# Altium PCB PCB_2020-05-24_14-58-45_2020-05-25_04-14-55.pcbdoc
Units mil, origin at the board's own origin, x right, y up, seen from the top; angles counter-clockwise.
Board outline 4835 x 2600 mil, 2 copper layers (Top Layer, Bottom Layer); 44 components, 69 nets, 258 pads, 0 vias.
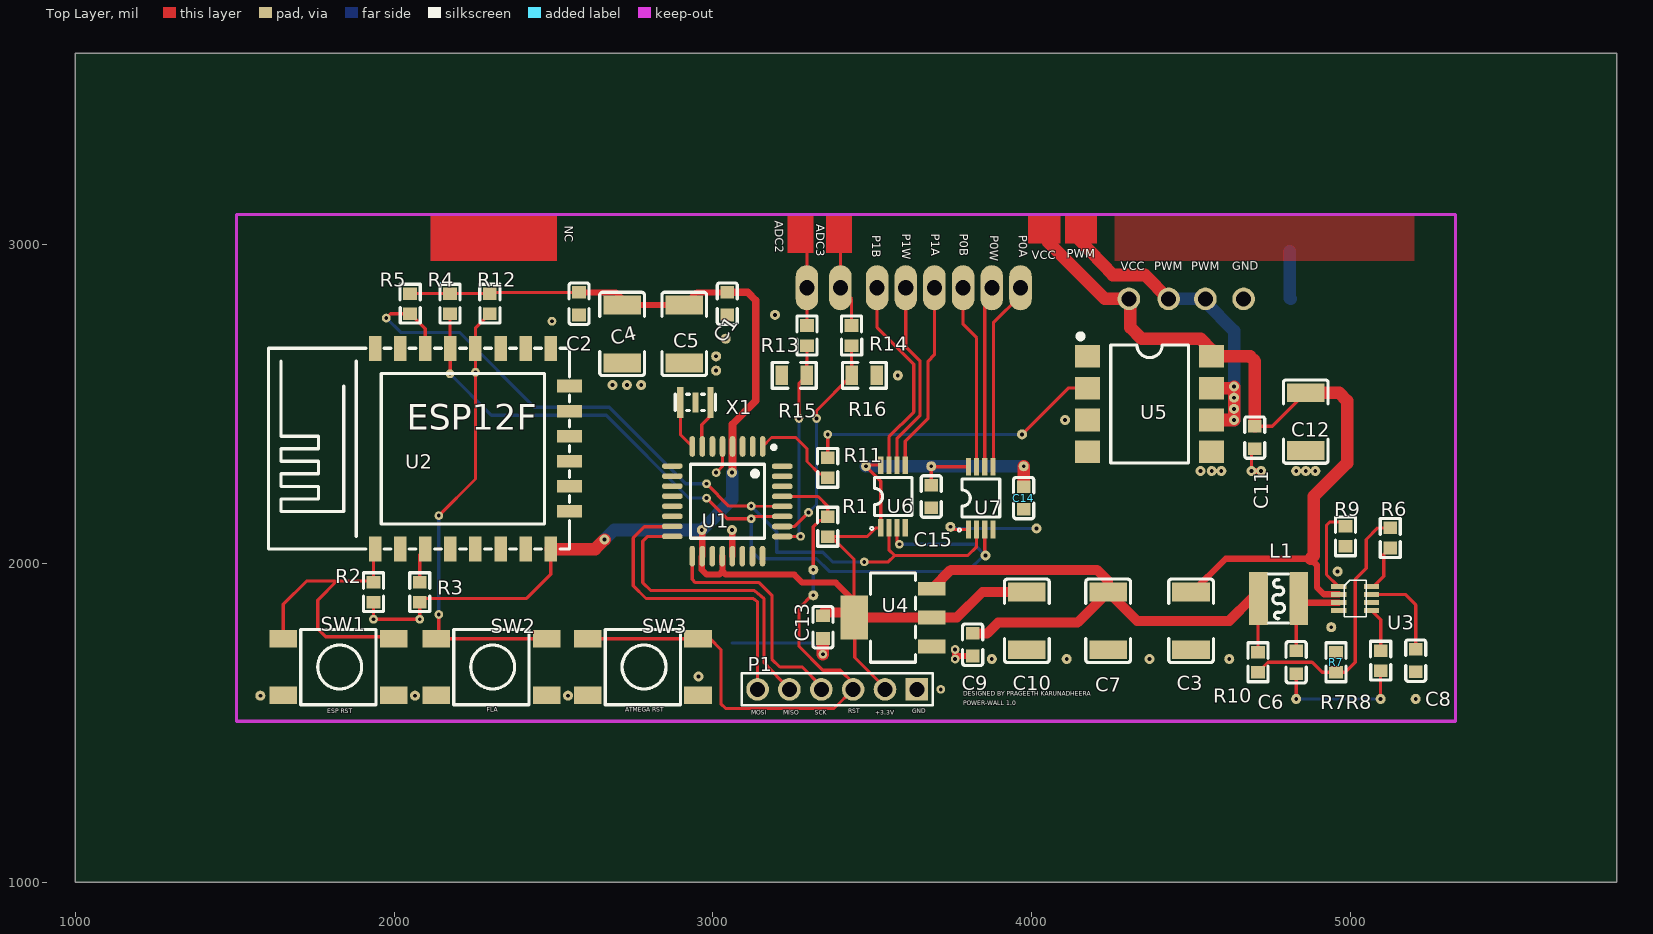
[diagram p0: Top Layer view]
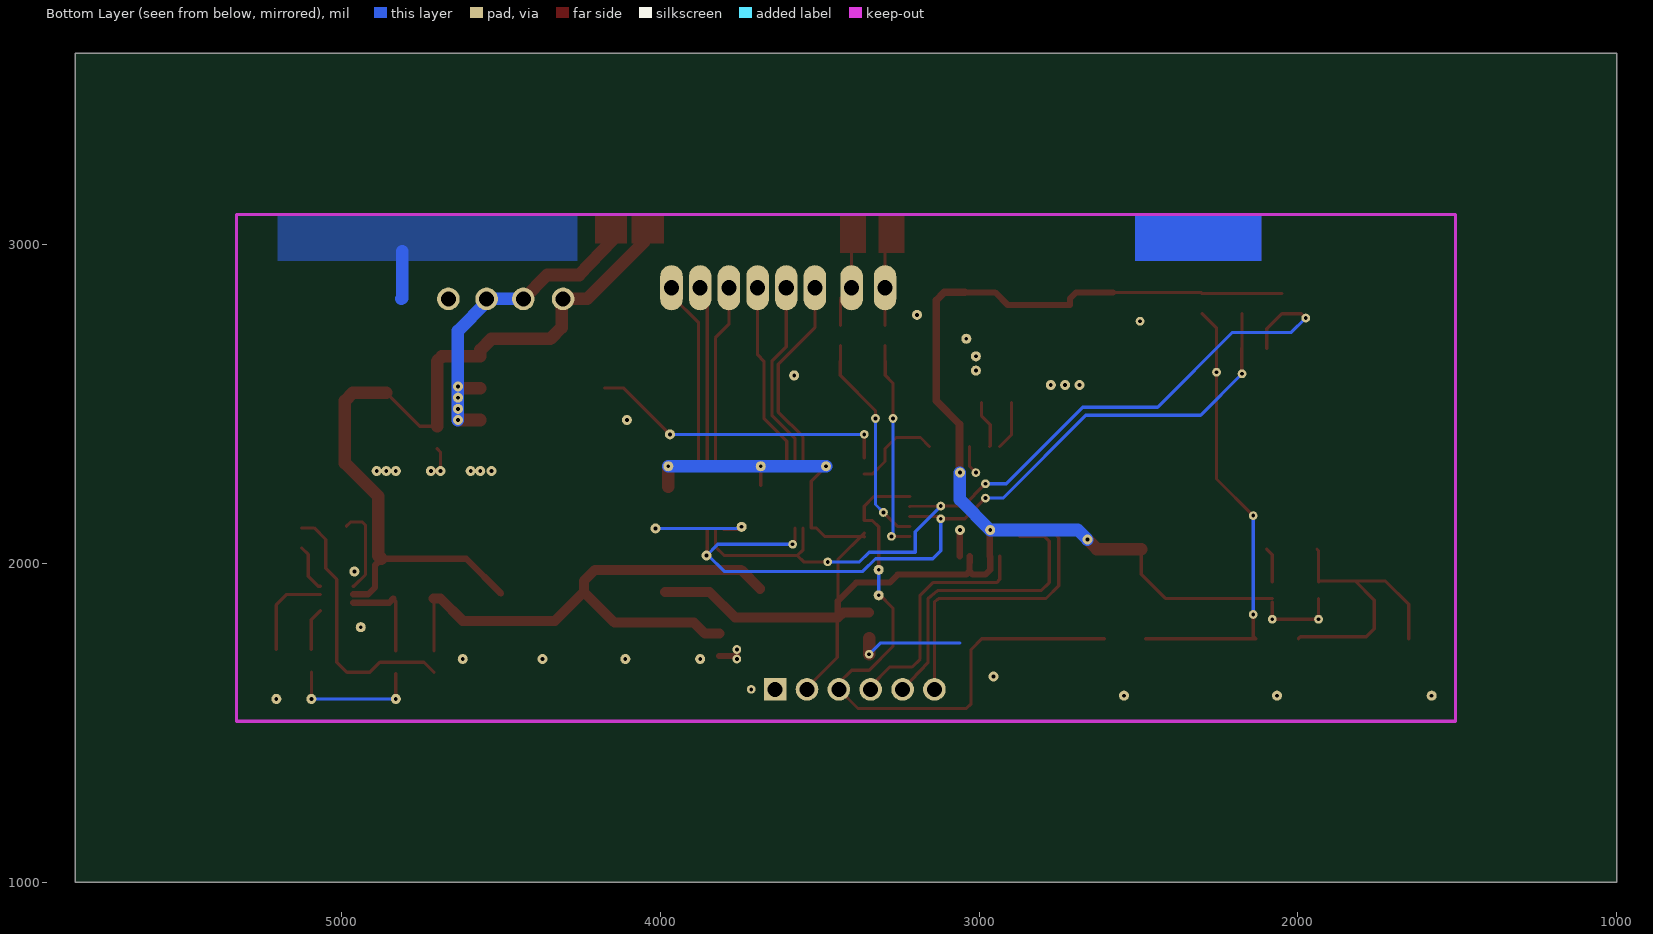
[diagram p1: Bottom Layer view, seen from below]

## Layer stack, top to bottom
Top Layer: signal copper (thickness not stored)
Dielectric: dielectric 12.6, FR-4, Dk 4.8
Bottom Layer: signal copper (thickness not stored)

## Board outline
5835,1000 1000,1000 1000,3600 5835,3600

## Components (designator, comment, footprint, x,y, rotation, side; value= is the part's Value field where it differs from the comment)
C1 "0.1u" C0603 3045.03,2815 r270 top
C2 "0.1u" C0603 2580.03,2815 r270 top
C3 "22uF" C1812 4500,1820 r270 top
C4 "10uF" C1812 2910,2720 r90 top
C5 "10uF" C1812 2715,2720 r270 top
C6 "0.1u" C0603 4830,1690 r270 top
C7 "47uF" C1812 4240,1820 r270 top
C8 "0.1u" C0603 5205.03,1695 r90 top
C9 "0.1u" C0603 3815,1745 r270 top
C10 "10uF" C1812 3985,1820 r270 top
C11 "0.1u" C0603 4700,2395 r90 top
C12 "22uF" C1812 4860,2445 r270 top
C13 "0.1u" C0603 3345,1800 r90 top
C14 "0.1u" C0603 3975,2205 r270 top
C15 "0.1u" C0603 3685,2210 r270 top
L1 "4.7uH" L0420 4775,1890 r0 top
P1 "Header-Female-2.54_1x6" HDR-TH_6P-P2.54-V 3390,1605 r180 top
R1 "10k" R0603 3360.03,2115 r270 top
R2 "10k" R0603 1935.03,1910 r270 top
R3 "10k" R0603 2080.03,1910 r270 top
R4 "10k" R0603 2175.03,2815 r270 top
R5 "10k" R0603 2050,2815 r270 top
R6 "20k" R0603 5125,2080 r270 top
R7 "7.5k" R0603 4955.03,1690 r90 top
R8 "20" R0603 5095.03,1695 r270 top
R9 "75k" R0603 4985,2085 r90 top
R10 "402k" R0603 4710.03,1690 r90 top
R11 "1k" R0603 3360.03,2300 r270 top
R12 "10k" R0603 2300,2815 r270 top
R13 "10k" R0603 3295,2715 r270 top
R14 "10k" R0603 3435,2715 r270 top
R15 "470" R0805 3254.97,2590 r0 top
R16 "470" R0805 3474.97,2590 r180 top
SW1 "RESET" SW-SMD_4PIN-L6.00-W6.00 1825,1675 r0 top
SW2 "FLASH" SW-SMD_4PIN-L6.00-W6.00 2305,1675 r0 top
SW3 "RESET" SW-SMD_4PIN-L6.00-W6.00 2780,1675 r0 top
U1 "ATMEGA328PB-AU" TQFP-32_L7.0-W7.0-P0.80-LS9.0-BL 3045,2195 r180 top
U2 "ESP-12F(ESP8266MOD)" WIFIM-SMD_ESP-12F-ESP8266MOD 2245,2360 r90 top
U3 "MP2315GJ-Z" MP2315GJ-Z_TSOT-23-8 5015,1890 r0 top
U4 "AMS1117-3.3" SOT-223-3_L6.5-W3.4-P2.30-LS7.0-BR 3565,1830 r0 top
U5 "FOD3180SD" SOIC-8_L9.5-W6.6-P2.54-LS10.7-BL 4370,2500 r0 top
U6 "MCP4561-104E/MS" MSOP-8_L3.0-W3.0-P0.65-LS5.0-BL 3565,2210 r0 top
U7 "MCP4561-503E/MS" MSOP-8_L3.0-W3.0-P0.65-LS5.0-BL 3840,2205 r0 top
X1 "8MHz" OSC-SMD_3P-L3.2-W1.3-P1.2-L 2945,2505 r180 top

## Footprints (in the part's own frame and the unit in brackets; to place one, negate y for a bottom-side part, rotate by r counter-clockwise, add the part's x,y. Pads: shape width x height; smd on the part's side, far side on the other; paste and mask are expansions set on the pad)
C0603 [mm]
  rect 1x1.1 smd: 1(-0.9,0) 2(0.9,0)
  silkscreen extent -1.65,-0.8 1.65,0.8
C1812 [mm]
  rect 1.5x3 smd: 1(-2.305,0) 2(2.305,0)
  silkscreen extent -3.32,-1.78 3.32,1.78
HDR-TH_6P-P2.54-V [mm]
  rect 1.8x1.8 hole 1.2: 1(-6.35,0)
  round 1.8 hole 1.2: 2(-3.81,0) 3(-1.27,0) 4(1.27,0) 5(3.81,0) 6(6.35,0)
  silkscreen extent -7.62,-1.27 7.62,1.27
L0420 [mil]
  rect 59.1x165.4 smd: 1(-63,0) 2(63,0)
  silkscreen extent -31,-77 31,77
MP2315GJ-Z_TSOT-23-8 [mm]
  rect 1.22x0.4 smd: 1(-1.31,0.97) 2(-1.31,0.33) 3(-1.31,-0.33) 4(-1.31,-0.97) 5(1.31,-0.97) 6(1.31,-0.33) 7(1.31,0.33) 8(1.31,0.97)
  silkscreen extent -0.88,-1.45 0.88,1.45
MSOP-8_L3.0-W3.0-P0.65-LS5.0-BL [mil]
  rect 16x55 smd: 1(-38.39,-98.5) 2(-12.8,-98.5) 3(12.8,-98.5) 4(38.39,-98.5) 5(38.39,98.5) 6(12.8,98.5) 7(-12.8,98.5) 8(-38.39,98.5)
  silkscreen extent -72,-105 60,60
OSC-SMD_3P-L3.2-W1.3-P1.2-L [mil]
  rect 19.68x98.42 smd: 1(-47.2,0) 3(47.2,0)
  rect 19.68x63 smd: 2(0,0)
  silkscreen extent -63,-26 63,26
R0603 [mm]
  rect 1x1.1 smd: 1(-0.8,0) 2(0.8,0)
  silkscreen extent -1.55,-0.8 1.55,0.81
R0805 [mm]
  rect 1x1.55 smd: 1(-1,0) 2(1,0)
  silkscreen extent -1.75,-1.02 1.75,1.02
SOIC-8_L9.5-W6.6-P2.54-LS10.7-BL [mm]
  rect 2x1.8 smd: 1(-4.951,3.81) 2(-4.951,1.27) 3(-4.951,-1.27) 4(-4.951,-3.81) 5(4.95,-3.81) 6(4.95,-1.27) 7(4.95,1.27) 8(4.95,3.81)
  silkscreen extent -5.7,-4.7 3.1,5.6
SOT-223-3_L6.5-W3.4-P2.30-LS7.0-BR [mm]
  rect 2.2x1.1 smd: 1(3.099,-2.3) 2(3.099,0) 3(3.099,2.3)
  rect 2.2x3.5 smd: 4(-3.099,0)
  silkscreen extent -1.8,-3.55 1.8,3.55
SW-SMD_4PIN-L6.00-W6.00 [mm]
  rect 2.2x1.4 smd: 1(-4.4,2.25) 2(4.4,2.25) 3(-4.4,-2.25) 4(4.4,-2.25)
  silkscreen extent -3,-3 3,3
TQFP-32_L7.0-W7.0-P0.80-LS9.0-BL [mm]
  oval 0.45x1.65 smd: 1(-2.817,-4.369) 2(-2.017,-4.369) 3(-1.217,-4.369) 4(-0.417,-4.369) 5(0.381,-4.369) 6(1.181,-4.369) 7(1.981,-4.369) 8(2.781,-4.369) 17(2.792,4.369) 18(1.991,4.369) 19(1.191,4.369) 20(0.391,4.369) 21(-0.406,4.369) 22(-1.206,4.369) 23(-2.007,4.369) 24(-2.807,4.369)
  oval 1.65x0.45 smd: 9(4.382,-2.804) 10(4.382,-2.004) 11(4.382,-1.204) 12(4.382,-0.404) 13(4.382,0.394) 14(4.382,1.194) 15(4.382,1.994) 16(4.382,2.794) 25(-4.381,2.804) 26(-4.381,2.004) 27(-4.381,1.204) 28(-4.381,0.404) 29(-4.381,-0.394) 30(-4.381,-1.194) 31(-4.381,-1.994) 32(-4.381,-2.794)
  silkscreen extent -3.86,-4.45 2.94,2.95
WIFIM-SMD_ESP-12F-ESP8266MOD [mm]
  rect 2x1 smd: 1(-8.002,7.751) 2(-8.002,5.751) 3(-8.002,3.751) 4(-8.002,1.751) 5(-8.002,-0.249) 6(-8.002,-2.249) 7(-8.002,-4.249) 8(-8.001,-6.249) 9(7.999,-6.249) 10(8,-4.249) 11(8.001,-2.249) 12(8.001,-0.249) 13(8,1.751) 14(8.001,3.751) 15(8,5.751) 16(8.001,7.751)
  rect 1x2 smd: 17(-5,-7.75) 18(-3.002,-7.749) 19(-1.003,-7.749) 20(0.998,-7.749) 21(2.997,-7.749) 22(4.997,-7.75)
  silkscreen extent -8,-7.75 8,16.25

## Free pads (board coordinates)
  round 70.87 hole 47.24: 1(4545,2830) 1(4665,2830) 2(4430,2830) 3(4305,2830)
  oval 70.87x141.73 hole 47.24: 3(3295,2865) 3(3400,2865) 3(3515,2865) 3(3605,2865) 3(3695,2865) 3(3785,2865) 3(3875,2865) 3(3965,2865)
  round 31.5 hole 12: ""(1580,1585) ""(2065,1585) ""(2545,1585) ""(2660,2075) ""(2685,2560) ""(2730,2560) ""(2775,2560) ""(2955,1645) ""(2965,2105) ""(3010,2605) ""(3010,2650) ""(3040,2705) ""(3060,2105) ""(3060,2285) ""(3195,2780) ""(3315,1900) ""(3315,1980) ""(3480,2305) ""(3580,2590) ""(3685,2305) ""(3745,2115) ""(3855,2025) ""(3875,1700) ""(3970,2405) ""(3975,2305) ""(4015,2110) ""(4105,2450) ""(4110,1700) ""(4370,1700) ""(4530,2290) ""(4565,2290) ""(4595,2290) ""(4620,1700) ""(4635,2450) ""(4635,2485) ""(4635,2520) ""(4635,2555) ""(4690,2290) ""(4720,2290) ""(4830,1575) ""(4830,2290) ""(4860,2290) ""(4890,2290) ""(4940,1800) ""(4960,1975) ""(5095,1575) ""(5205,1575)
  round 27.56 hole 12: ""(1935,1825) ""(1975,2770) ""(2080,1825) ""(2140,1840) ""(2140,2150) ""(2175,2595) ""(2255,2600) ""(2495,2760) ""(2980,2205) ""(2980,2250) ""(3010,2285) ""(3120,2140) ""(3120,2180) ""(3270,2455) ""(3275,2085) ""(3300,2160) ""(3325,2455) ""(3345,1715) ""(3360,2405) ""(3475,2005) ""(3585,2060) ""(3715,1605) ""(3760,1700) ""(3760,1730)

## Nets (pads, with @x,y where several pads share a name; then routed paths per layer and width w, separated by ;. In a path a pad name is that pad's centre, name@x,y a point inside that pad or via, vN(x,y) a via of type N, cw(c..) or ccw(c..) an arc to the next point about the centre after c; other vN are vias at no path point)
+3.3V: C1.1 C2.1 C4.2 C5.1 C10.1 C13.2 C14.1 C15.1 P1.2 pad.@1935,1825 pad.@2080,1825 pad.@2660,2075 pad.@2965,2105 pad.@3060,2285 pad.@3480,2305 pad.@3685,2305 pad.@3975,2305 R1.2 R2.2 R3.2 R4.1 R5.1 R12.1 U1.4 U1.18 U1.20 U2.8 U4.2 U4.4 U6.1 U6.8 U7.8 | length 6389.3
  Top Layer w10: R2.2@1935,1890.32 1935,1825 2080,1825 R3.2 ; R5.1 R4.1 R12.1 2303.94,2850.43 C2.1 ; R3.2@2080,1890.32 2415.32,1890.32 2491.04,1966.04 U2.8 ; R1.2@3360.01,2095.32 3443,2012.32 U4.4 3445,1828 3445,1705 3540,1610 P1.2 ; R1.2 3361.53,2085 3485,2085 3511.5,2111.5 U6.1 3526.61,2258.39 3480,2305 3483.5,2308.5 U6.8 ; C15.1 3685,2305 3686.5,2303.5 U7.8
  Top Layer w19.68: C2.1 2695,2850.43 2715,2830.43 C5.1 ; C5.1 C4.2 ; C4.2@2910,2810.75 2949.68,2850.43 C1.1 ; pad.@2965,2105 2966.6,2103.4 U1.18 2965,2021.4 2965,1980 2980,1965 3020,1965 3030,1975 ; U1.20 3030,1975 ; U4.4 3443,1882 3385,1940 3280,1940 3255,1965 3040,1965 3030,1975
  Top Layer w23.62: C1.1 3109.57,2850.43 3135,2825 3135,2510 3061.4,2436.4 U1.4 3061.4,2286.4 pad.@3060,2285
  Top Layer w31.5: C13.2@3345.01,1845.44 3427.56,1845.44 U4.4 U4.2 3765,1830 3845.75,1910.74 C10.1
  Top Layer w39.37: U2.8 2630.01,2045.01 pad.@2660,2075 ; C14.1 pad.@3975,2305
  Bottom Layer w39.37: pad.@2660,2075 2690,2105 2965,2105 3060,2200 pad.@3060,2285 ; pad.@3480,2305 3685,2305 pad.@3975,2305
+5V: C7.1 C9.1 L1.1 R10.2 U4.3 | length 1809.3
  Top Layer w10: R10.2@4710.01,1725.44 4710.01,1888.01 L1.1
  Top Layer w31.5: U4.3@3687,1920.55 3746.45,1980 4205,1980 4240,1945 C7.1 ; C9.1 3860.43,1780.43 3895,1815 4144.25,1815 C7.1 ; L1.1 4690,1890 4620,1820 4330.75,1820 C7.1
ADC2: pad.3@3295,2865 R13.1 | length 265.6
  Top Layer w10: R13.1 3295,2865 3295,3005 3300,3010
ADC3: pad.3@3400,2865 R14.1 | length 290.1
  Top Layer w10: 3395,3020 3400,3015 3400,2865 3435,2830 R14.1
C6_2: C6.2 pad.@4830,1575 pad.@5095,1575 R8.2 | length 429.2
  Top Layer w10: pad.@4830,1575 C6.2 ; pad.@5095,1575 R8.2@5095,1659.6
  Bottom Layer w10: pad.@4830,1575 pad.@5095,1575
GND: C1.2 C2.2 C3.2 C4.1 C5.2 C7.2 C8.1 C9.2 C10.2 C11.1 C12.2 C13.1 C14.2 C15.2 P1.1 pad.1@4665,2830 pad.@1580,1585 pad.@2065,1585 pad.@2495,2760 pad.@2545,1585 pad.@2685,2560 pad.@2730,2560 pad.@2775,2560 pad.@2955,1645 pad.@3010,2285 pad.@3010,2605 pad.@3010,2650 pad.@3040,2705 pad.@3060,2105 pad.@3195,2780 pad.@3345,1715 pad.@3580,2590 pad.@3715,1605 pad.@3745,2115 pad.@3760,1700 pad.@3760,1730 pad.@3875,1700 pad.@4015,2110 pad.@4105,2450 pad.@4110,1700 pad.@4370,1700 pad.@4530,2290 pad.@4565,2290 pad.@4595,2290 pad.@4620,1700 pad.@4690,2290 pad.@4720,2290 pad.@4830,2290 pad.@4860,2290 pad.@4890,2290 pad.@4940,1800 pad.@4960,1975 pad.@5205,1575 R7.2 R9.1 R15.1 R16.1 SW1.3 SW1.4 SW2.3 SW2.4 SW3.3 SW3.4 U1.5 U1.21 U2.9 U3.4 U4.1 U5.3 U5.5 U6.4 U7.1 U7.4 X1.2 | length 1280
  Top Layer w10: pad.@3010,2285 3030,2305 U1.5 ; pad.@3745,2115 3753.5,2106.5 U7.1 ; pad.@4690,2290 4690,2349.57 C11.1
  Top Layer w11.81: pad.@3060,2105 3061,2104 U1.21
  Top Layer w19.68: pad.@3060,2105 3061,2104 U1.21 ; pad.@3760,1730 3760,1700 3769.56,1709.56 C9.2 ; pad.@4690,2290 pad.@4720,2290
  Top Layer w39.37: pad.@3345.01,1715.01 C13.1
  Bottom Layer w10: 3060,1750 3310,1750 pad.@3345,1715 ; pad.@3745,2115 3750,2110 pad.@4015,2110
  Bottom Layer w39.37: 4810,2980 4810,2832.31 4812.31,2830
P0A: pad.3@3965,2865 U7.5 | length 597.4
  Top Layer w10: U7.5 3880,2305.11 3880,2755 3965,2840 pad.3@3965,2865
P0B: pad.3@3785,2865 U7.7 | length 579
  Top Layer w10: pad.3@3785,2865 3785,2750 3827.2,2707.8 U7.7
P0W: pad.3@3875,2865 U7.6 | length 570.7
  Top Layer w10: U7.6 3852.8,2842.8 pad.3@3875,2865
P1A: pad.3@3695,2865 U6.5 | length 594.4
  Top Layer w10: U6.5 3603.39,2383.39 3675,2455 3675,2635 3695,2655 pad.3@3695,2865
P1B: pad.3@3515,2865 U6.7 | length 636.4
  Top Layer w10: pad.3@3515,2865 3515,2740 3630,2625 3630,2475 3552.2,2397.2 U6.7
P1W: pad.3@3605,2865 U6.6 | length 605
  Top Layer w10: U6.6 3577.8,2392.8 3650,2465 3650,2635 3605,2680 pad.3@3605,2865
PWMOUT: pad.1@4545,2830 pad.2 pad.@4635,2450 pad.@4635,2485 pad.@4635,2520 pad.@4635,2555 U5.6 U5.7 | length 1137.7
  Top Layer w39.37: 4150,3015 4255,2905 4355,2905 pad.2 ; U5.6 4635,2450 4635,2485 4635,2520 4635,2555 4630,2550 U5.7
  Bottom Layer w39.37: pad.2 4545,2830 4545,2820 4635,2730 4635,2555 4635,2520 4635,2485 pad.@4635,2450
R6_1: R6.1 R7.1 R10.1 | length 833.7
  Top Layer w10: R10.1 4741.52,1690 4880,1690 4911.49,1658.51 R7.1 4983.51,1658.51 5015,1690 5015,1950 5050,1985 5050,2075 5086.49,2111.49 R6.1
U1_1: R11.2 U1.1 | length 286.6
  Top Layer w10: U1.1 3183.9,2395 3260,2395 3295,2360 3295,2320 3334.68,2280.32 R11.2@3360.01,2280.32
U1_2: U1.2
U1_3: U1.3
U1_6: U1.6
U1_7: U1.7 X1.1 | length 150.1
  Top Layer w10: U1.7 2965,2369 2965,2435 2992.2,2462.2 X1.1
U1_8: U1.8 X1.3 | length 153.6
  Top Layer w10: X1.3 2897.8,2404.7 U1.8
U1_9: U1.9
U1_10: U1.10
U1_11: U1.11
U1_12: U1.12
U1_13: U1.13
U1_14: U1.14
U1_15: P1.6 U1.15 | length 972.2
  Top Layer w10: U1.15 2871,2115 2785,2115 2750,2080 2750,1930 2790,1890 3125,1890 3140,1880 P1.6
U1_16: P1.5 U1.16 | length 944.8
  Top Layer w10: U1.16 2795,2085 2780,2070 2780,1940 2805,1915 3130,1915 3160,1890 3160,1690 P1.5
U1_17: P1.4 U1.17 | length 743.9
  Top Layer w10: U1.17 2935,1950 2945,1940 3145,1940 3185,1900 3185,1700 3210,1675 3280,1675 3340,1615 P1.4
U1_19: U1.19
U1_22: U1.22
U1_23: U1.23
U1_24: U1.24
U1_25: pad.@3270,2455 pad.@3275,2085 R13.2 R15.2 U1.25 | length 668.3
  Top Layer w10: U1.25 3217.9,2085 pad.@3275,2085 ; pad.@3270,2455 3270,2565.66 R15.2 ; R15.2 R13.2
  Bottom Layer w10: pad.@3270,2455 3270,2090 pad.@3275,2085
U1_26: pad.@3300,2160 pad.@3325,2455 R14.2 R16.2 U1.26 | length 680.4
  Top Layer w10: U1.26 3256.1,2116.1 pad.@3300,2160 ; pad.@3325,2455 3325,2479.4 R16.2 R14.2
  Bottom Layer w10: pad.@3300,2160 3325,2185 pad.@3325,2455
U1_27: pad.@2175,2595 pad.@2980,2205 pad.@3120,2140 pad.@3585,2060 pad.@3855,2025 R4.2 U1.27 U2.13 U6.3 U7.3 | length 2727.5
  Top Layer w10: pad.@2175,2595 2176.08,2596.08 U2.13 2175.03,2676.01 R4.2 ; pad.@2980,2205 3045,2140 3120,2140 3127.6,2147.6 U1.27 ; U6.3 3577.8,2067.2 pad.@3585,2060 ; U7.3 3852.8,2027.2 pad.@3855,2025
  Bottom Layer w10: pad.@2175,2595 2305,2465 2665,2465 2925,2205 pad.@2980,2205 ; pad.@3120,2140 3120,2040 3145,2015 3325,2015 3365,1975 3800,1975 3850,2025 3855,2025 3820,2060 pad.@3585,2060
U1_28: pad.@1975,2770 pad.@2980,2250 pad.@3120,2180 pad.@3475,2005 R5.2 U1.28 U2.14 U6.2 U7.2 | length 2681.1
  Top Layer w10: pad.@1975,2770 1988.5,2783.5 R5.2 2097.34,2736.17 U2.14 ; pad.@2980,2250 3050,2180 3120,2180 U1.28 ; pad.@3475,2005 3550,2005 3570,2025 ; U6.2 3552.2,2042.8 3570,2025 ; U7.2 3827.2,2052.2 3800,2025 3570,2025
  Bottom Layer w10: pad.@1975,2770 2020,2725 2205,2725 2440,2490 2675,2490 2915,2250 pad.@2980,2250 ; pad.@3120,2180 3200,2100 3200,2035 3345,2035 3375,2005 pad.@3475,2005
U1_29: P1.3 pad.@3315,1900 pad.@3315,1980 R1.1 SW3.1 SW3.2 U1.29 | length 1932.8
  Top Layer w10: SW3.1 SW3.2 ; SW3.2 2991.42,1763.58 3025,1730 3025,1560 3040,1545 3380,1545 P1.3 3440,1625 3400,1665 3345,1665 3270,1740 3270,1860 pad.@3315,1905 ; U1.29 3287.16,2210.19 3330,2210 3360,2180 3360,2134.7 3334.68,2134.68 3315,2115 pad.@3315,1980
  Bottom Layer w10: pad.@3315,1905 pad.@3315,1980
U1_30: U1.30
U1_31: U1.31
U1_32: U1.32
U2_1: R2.1 SW1.1 SW1.2 U2.1 | length 954.9
  Top Layer w10: SW1.1 1651.77,1871.77 1725,1945 1931.52,1945 R2.1 1935.03,2040.15 U2.1 ; 1820.2,1945 1760,1885 1760,1795 1785,1770 1991.8,1770 SW1.2
U2_2: U2.2
U2_3: R3.1 U2.3 | length 110.7
  Top Layer w10: R3.1 2080.03,2027.67 U2.3
U2_4: U2.4
U2_5: U2.5
U2_6: U2.6
U2_7: U2.7
U2_10: U2.10
U2_11: U2.11
U2_12: pad.@2140,1840 pad.@2140,2150 pad.@2255,2600 R12.2 SW2.1 SW2.2 U2.12 | length 1436.1
  Top Layer w10: pad.@2140,1840 2140,1771.8 SW2.1 SW2.2 ; pad.@2140,2150 2255,2265 2255,2600 U2.12 2254.82,2738.32 R12.2
  Bottom Layer w10: pad.@2140,1840 pad.@2140,2150
U2_15: U2.15
U2_16: U2.16
U2_17: U2.17
U2_18: U2.18
U2_19: U2.19
U2_20: U2.20
U2_21: U2.21
U2_22: U2.22
U3_1: R9.2 U3.1 | length 278.4
  Top Layer w10: U3.1 4961.81,1928.19 4925,1965 4925,2120 4935,2130 4971.5,2130 R9.2
U3_3: C6.1 L1.2 U3.3 | length 298.7
  Top Layer w10: C6.1 4830.01,1882 L1.2
  Top Layer w19.68: L1.2 4850.99,1877.01 U3.3
U3_5: R8.1 U3.5 | length 133.2
  Top Layer w10: U3.5 5095.04,1823.35 R8.1@5095.04,1730.43
U3_6: U3.6
U3_7: C8.2 U3.7 | length 291.7
  Top Layer w10: U3.7 5172.01,1902.99 5205.04,1869.96 C8.2
U3_8: R6.2 U3.8 | length 148.4
  Top Layer w10: U3.8 5073.19,1928.19 5105,1960 5105,2028.5 R6.2
U5_1: U5.1
U5_2: pad.@3360,2405 pad.@3970,2405 R11.1 U5.2 | length 948.7
  Top Layer w10: R11.1 pad.@3360,2405 ; pad.@3970,2405 4115,2550 U5.2
  Bottom Layer w10: pad.@3360,2405 pad.@3970,2405
U5_4: U5.4
VCC: C3.1 C11.2 C12.1 pad.3@4305,2830 U3.2 U5.8 | length 2571.4
  Top Layer w10: C11.2 4754.7,2430.44 C12.1
  Top Layer w19.68: C3.1@4500,1905.7 4609.3,2015 4875,2015 4895,1995 4895,1925 4917,1903 U3.2
  Top Layer w39.37: 4050,3010 4230,2830 pad.3@4305,2830 ; pad.3@4292.98,2842.02 pad.3@4305,2830 ; C11.2 4700,2635 4685,2650 U5.8 4564.9,2670.1 4530,2705 4345,2705 4310,2740 4310,2825 pad.3@4305,2830 ; C12.1 4964.26,2535.74 4990,2510 4990,2315 4885,2210 4885,2025 4875,2015

## Polygon pours and split planes (outlines as drawn)
GND on Bottom Layer (solid): 1510,3090 5325,3090 5325,1510 1510,1510 1510,1515
GND on Top Layer (solid): 1510,3090 5325,3090 5325,1510 1510,1510

## Other copper
Top Layer:
  region: 2115,2950 2115,3090 2120,3090 2510,3090 2510,2950 2115,2950
  region net PWMOUT: 4105,3005 4105,3090 4205,3090 4205,3005 4105,3005
  region net VCC: 4090,3090 3990,3090 3990,3005 4090,3005
  region net ADC2: 3235,2975 3235,3090 3315,3090 3315,2975 3235,2975
  region net ADC3: 3355,2975 3355,3090 3435,3090 3435,2975 3355,2975
Bottom Layer:
  region: 2115,2950 2115,3090 2120,3090 2510,3090 2510,2950 2115,2950

## Silkscreen, mask and mechanical layers (free items; w line width, h text height)
Top Overlay:
  text "ADC2" at 3185,3075 h45 r271
  text "ADC3" at 3315,3065 h45 r270
  text "NC" at 2525,3060 h45 r270
  text "P1W" at 3585,3035 h45 r270
  text "P1A" at 3675,3035 h45 r270
  text "P0B" at 3765,3035 h45 r270
  text "P1B" at 3490,3030 h45 r270
  text "P0W" at 3860,3030 h45 r269
  text "P0A" at 3950,3030 h45 r271
  text "PWM" at 4110,2950 h45
  text "VCC" at 4000,2945 h45
  text "VCC" at 4280,2910 h45
  text "PWM" at 4385,2910 h45
  text "PWM" at 4500,2910 h45
  text "GND" at 4630,2910 h45 r1
  text "DESIGNED BY PRAGEETH KARUNADHEERA" at 3785,1580 h23.62
  text "POWER-WALL 1.0" at 3785,1550 h23.62
  text "R7" at 4905,1542.5 h45
  text "FLA" at 2290,1530 h23.62
  text "ATMEGA RST" at 2725,1530 h23.62
  text "ESP RST" at 1790,1525 h23.62
  text "RST" at 3425,1525 h23.62
  text "GND" at 3625,1525 h23.62 r1
  text "MOSI" at 3120,1520 h23.62
  text "MISO" at 3220,1520 h23.62
  text "SCK" at 3320,1520 h23.62
  text "+3.3V" at 3510,1520 h23.62
Top Solder:
  region: 2115,2950 2115,3090 2120,3090 2510,3090 2510,2950 2115,2950
  region net GND: 4260,3090 5200,3090 5200,2950 4260,2950
  region net GND: 4260,3090 5200,3090 5200,2950 4260,2950
  region: 2115,2950 2115,3090 2120,3090 2510,3090 2510,2950 2115,2950
  region: 4105,3005 4105,3090 4205,3090 4205,3005 4105,3005
  region: 4090,3090 3990,3090 3990,3005 4090,3005
  region net ADC3: 3355,2975 3355,3090 3435,3090 3435,2975 3355,2975
  region net VCC: 4090,3090 3990,3090 3990,3005 4090,3005
  region net PWMOUT: 4105,3005 4105,3090 4205,3090 4205,3005 4105,3005
  region net ADC2: 3235,2975 3235,3090 3315,3090 3315,2975 3235,2975
  lines w23.68: 3060,2285 3061.4,2286.4 3061.4,2367
Bottom Solder:
  region: 2115,2950 2115,3090 2120,3090 2510,3090 2510,2950 2115,2950
  region net GND: 4260,3090 5200,3090 5200,2950 4260,2950
  region: 2115,2950 2115,3090 2120,3090 2510,3090 2510,2950 2115,2950

## Text inside footprints (layer, text, board x,y; h text height)
U2: Top Overlay "ESP12F" at 2040,2420 h80